# EAGLE board Stator_PCB_ver_2.0 (EAGLE 7.4.0)
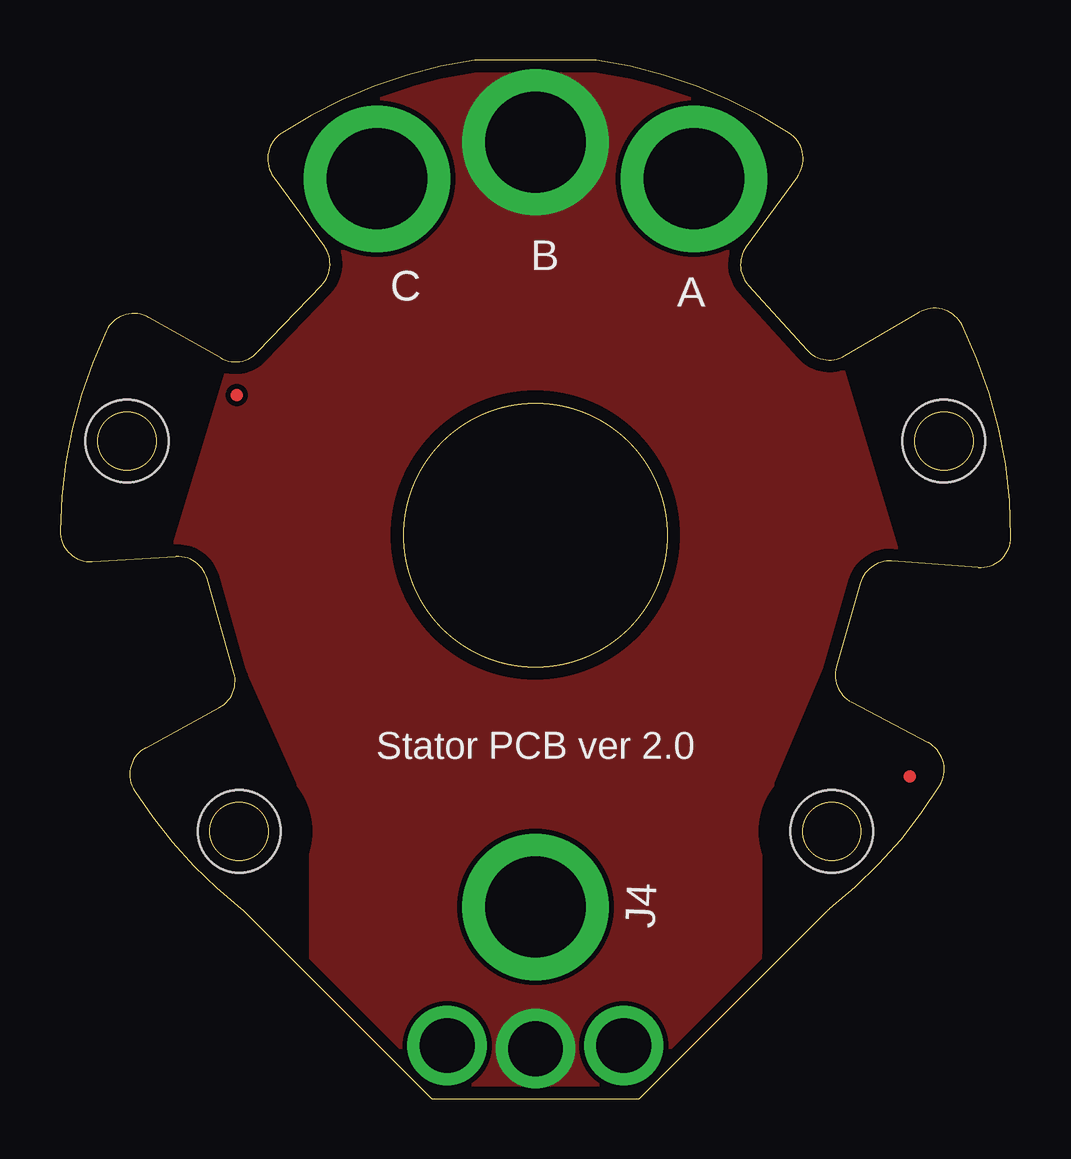
[diagram p0: board, top side]
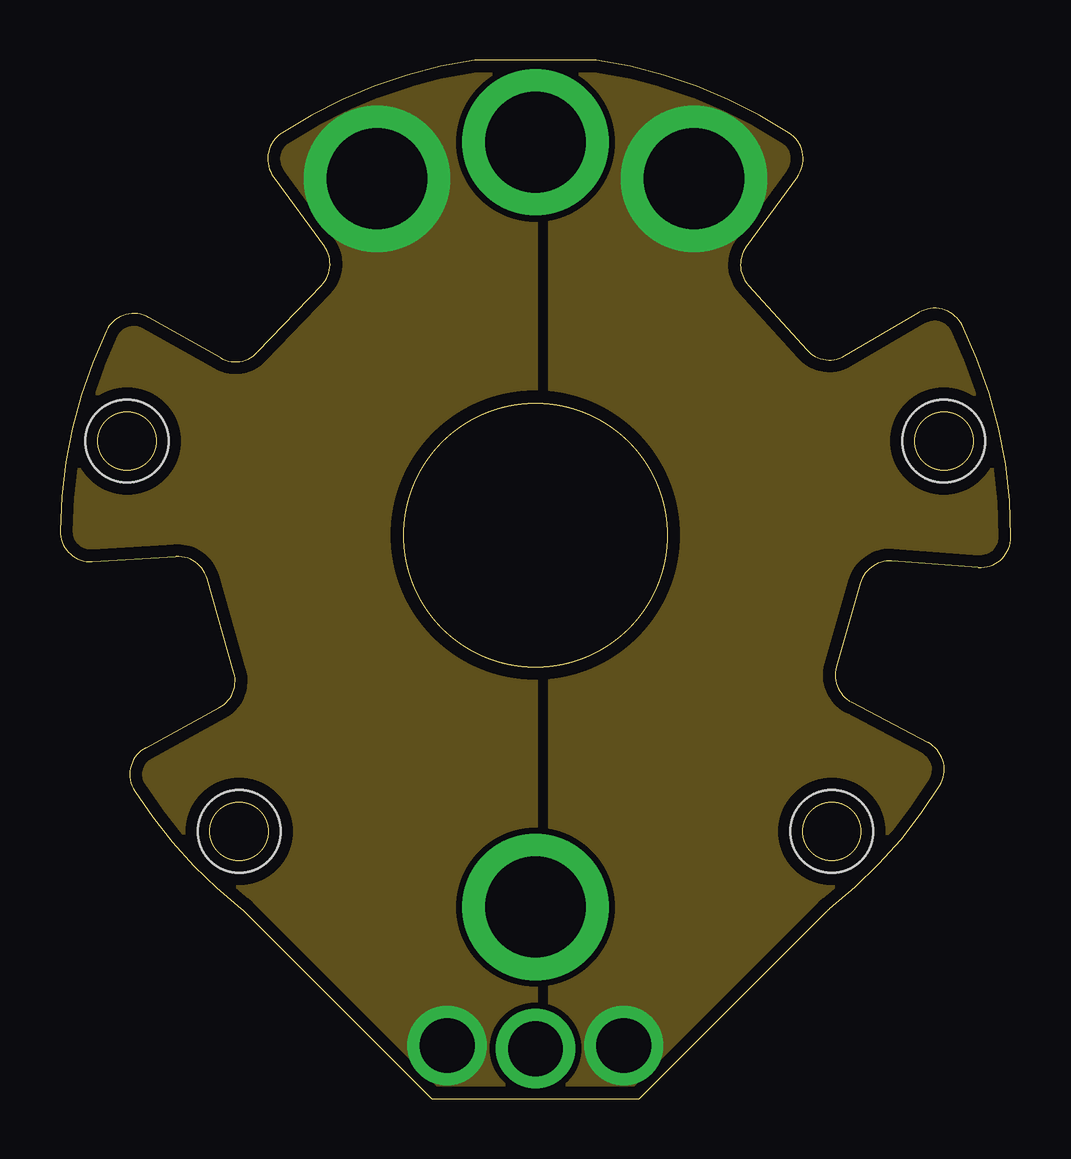
[diagram p1: board, inner layer Route2]
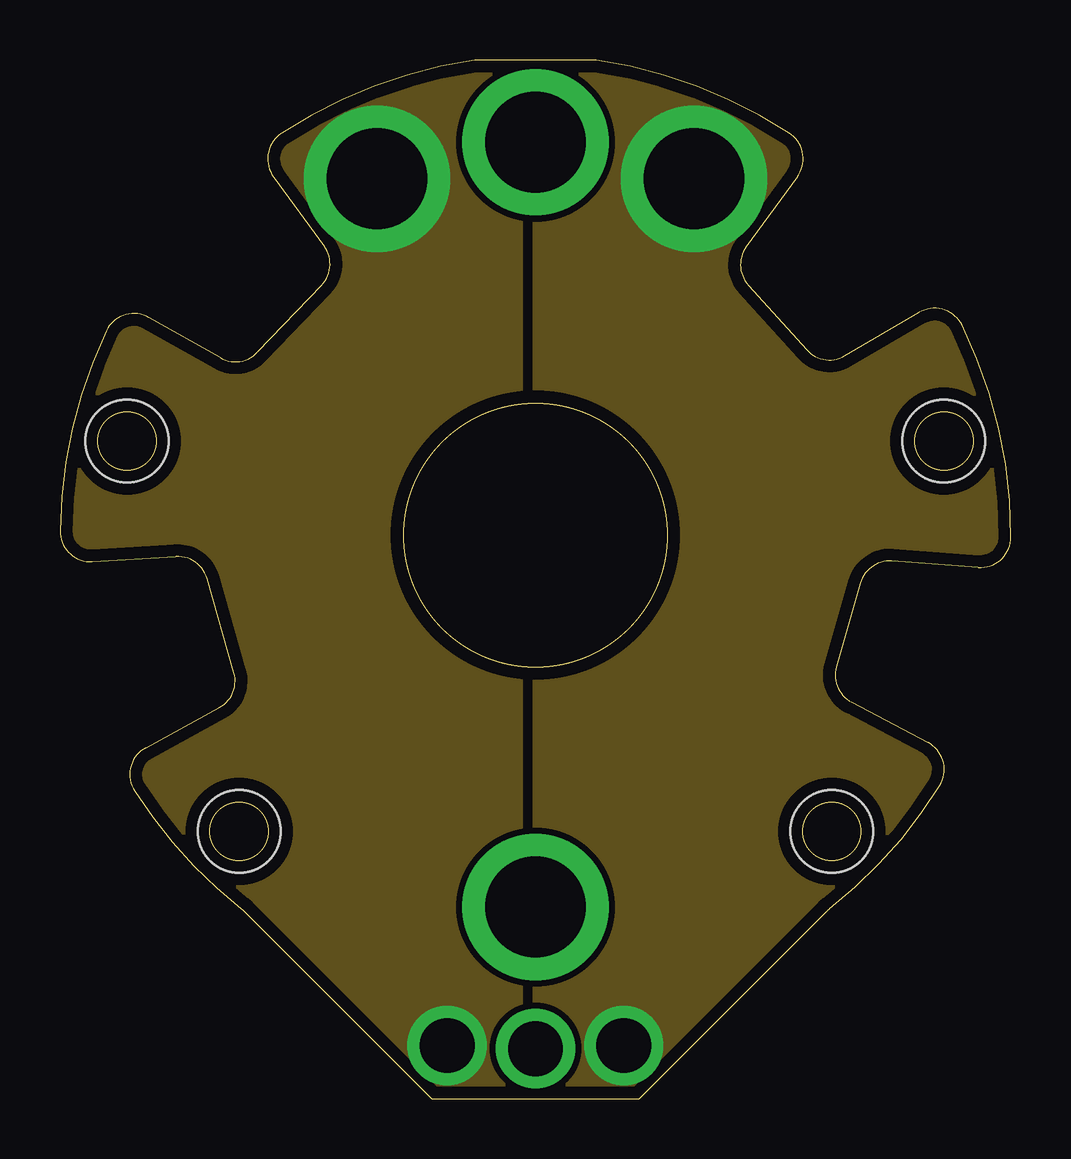
[diagram p2: board, inner layer Route3]
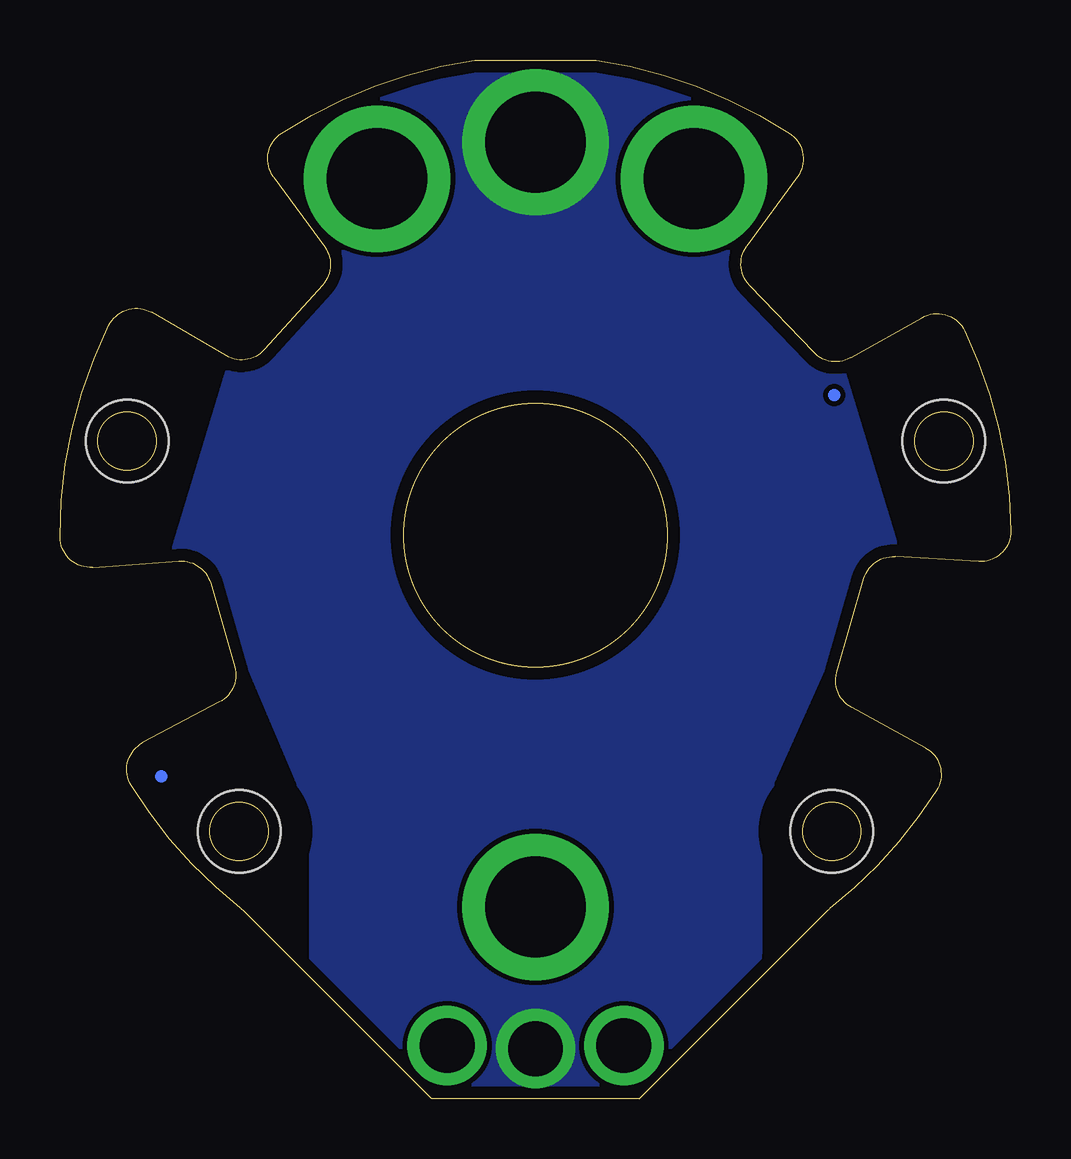
[diagram p3: board, bottom side, seen from below]

Size 39.62 x 43.31 mm. Coordinates in mm from the lower left corner, seen from the top.
Outline: 28.68,33.92 31.11,31.22 arc78 32.69,30.98 35.81,32.79 arc-94 37.58,32.25 arc-26 39.62,23.42 arc-94 38.26,22.16 34.67,22.42 arc78 33.35,21.5 32.35,18.01 arc78 32.98,16.54 36.17,14.85 arc-94 36.65,13.06 arc-20 32.08,7.94 arc7 31.97,7.84 24.13,0 15.49,0 7.65,7.84 arc7 7.54,7.94 arc-19 3.11,12.84 arc-94 3.57,14.64 6.64,16.31 arc77 7.25,17.78 6.13,21.69 arc77 4.83,22.61 1.35,22.4 arc-94 0,23.68 arc-25 1.93,32.02 arc-94 3.7,32.58 6.68,30.89 arc76 8.23,31.12 10.9,33.92 arc80 11.01,35.55 8.9,38.43 arc-94 9.25,40.26 arc-24 17.27,43.31 22.35,43.31 arc-24 30.38,40.26 arc-94 30.72,38.43 28.6,35.52 arc78 28.68,33.92
Outline: circle at 32.16,11.15 radius 1.22
Outline: circle at 19.81,23.5 radius 5.5
Outline: circle at 2.8,27.42 radius 1.22
Outline: circle at 7.46,11.15 radius 1.22
Outline: circle at 36.83,27.42 radius 1.22
Copper layers (1+2*3+16): Top 0.0711mm / dielectric 6mil / Route2 0.0711mm / dielectric 1mm / Route3 0.0711mm / dielectric 6mil / Bottom 0.0711mm
Design rules "default *": minimum track width 7mil, minimum drill 8mil, track to track 8mil, track to pad 8mil, pad to pad 8mil, via to via 8mil, smd to smd 8mil, copper to edge 20mil, drill to drill 8mil, minimum pad ring 5mil, minimum via ring 5mil, stop-mask expansion 2mil, vias tented up to drill 20mil, thermal gap 10mil
Holes 3.45 mm at 2.8,27.42 7.46,11.15 32.16,11.15 36.83,27.42
tRestrict: area 4.4,8.1 to 10.5,14.2; area -0.3,24.4 to 5.8,30.5; area 33.8,24.4 to 39.9,30.5; area 29.1,8.1 to 35.2,14.2; 6 lines
bRestrict: area -0.3,24.4 to 5.8,30.5; area 4.4,8.1 to 10.5,14.2; area 29.1,8.1 to 35.2,14.2; area 33.8,24.4 to 39.9,30.5; 6 lines

## Footprints (pad centres in the part's own frame; a part is rotated, then mirrored left to right if it is on the bottom)
4883 = drill 4.2 pad 6.1: P$1 0,0

## Placement (x,y rotation side)
A  48834883  [4883]  26.42,38.35 0 top
B  48834883  [4883]  19.81,39.88 0 top
C  48834883  [4883]  13.21,38.35 0 top
J4  48834883  [4883]  19.81,8 88 top
U$1  [20_MIL_FID]  35.4,13.45 0 top
U$2  [20_MIL_FID]  7.37,29.34 0 top

## Library data of the parts
A B C J4 = KEYSTONE
U$1 U$2 = fiducials

## Nets
A: A.P$1
B: B.P$1
C: C.P$1
NC: J4.P$1

## Tracks (layer width: path | path; a pad name or v marks a point on that pad's centre or on a via)
A  (via drill 2.29 pad 2.67)
  other vias: 23.49,2.22
  pour Route2 (isolate 0.254, no thermals): 46.48,49.53 46.48,-6.98 20.45,-6.98 20.45,49.53
  pour Route3 (isolate 0.254, no thermals): 46.48,49.53 46.48,-6.98 19.81,-6.98 19.81,49.53
B  (via drill 2.29 pad 2.67)
  other vias: 19.81,2.1
  pour Bottom (no thermals): -6.5,49.81 46.91,49.81 46.91,-7.24 -6.5,-7.24
  pour Top (no thermals): -7.11,49.71 -7.11,-7.59 46.28,-7.59 46.28,49.71
C  (via drill 2.29 pad 2.67)
  other vias: 16.13,2.22
  pour Route2 (isolate 0.254, no thermals): -6.22,49.53 19.81,49.53 19.81,-6.98 -6.22,-6.98
  pour Route3 (isolate 0.254, no thermals): -6.22,49.53 19.18,49.53 19.18,-6.98 -6.22,-6.98

## Text on the board
tPlace: Stator PCB ver 2.0
Panel: ROUTED AREA